# EAGLE board RoomIndicator.Outside.Multiple (EAGLE 6.4)
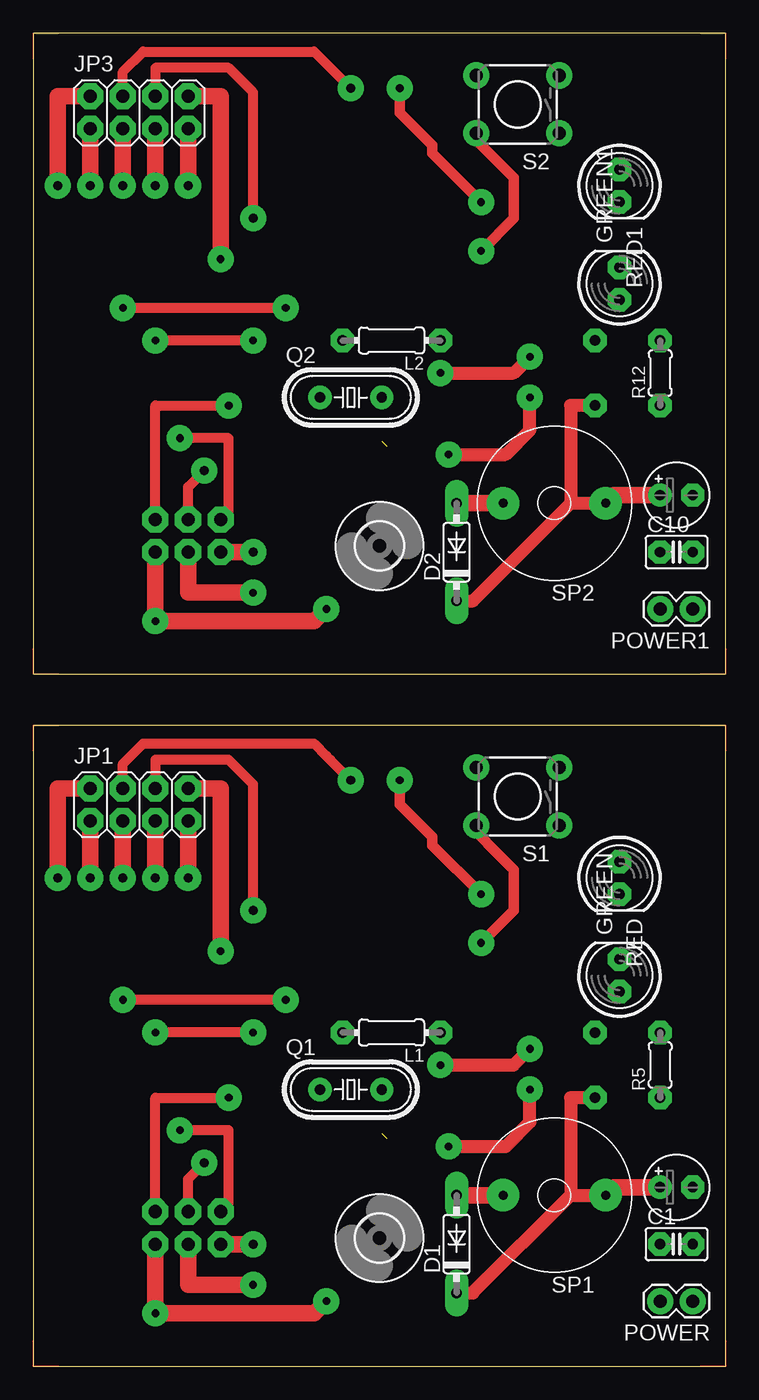
[diagram p0: board, top side]
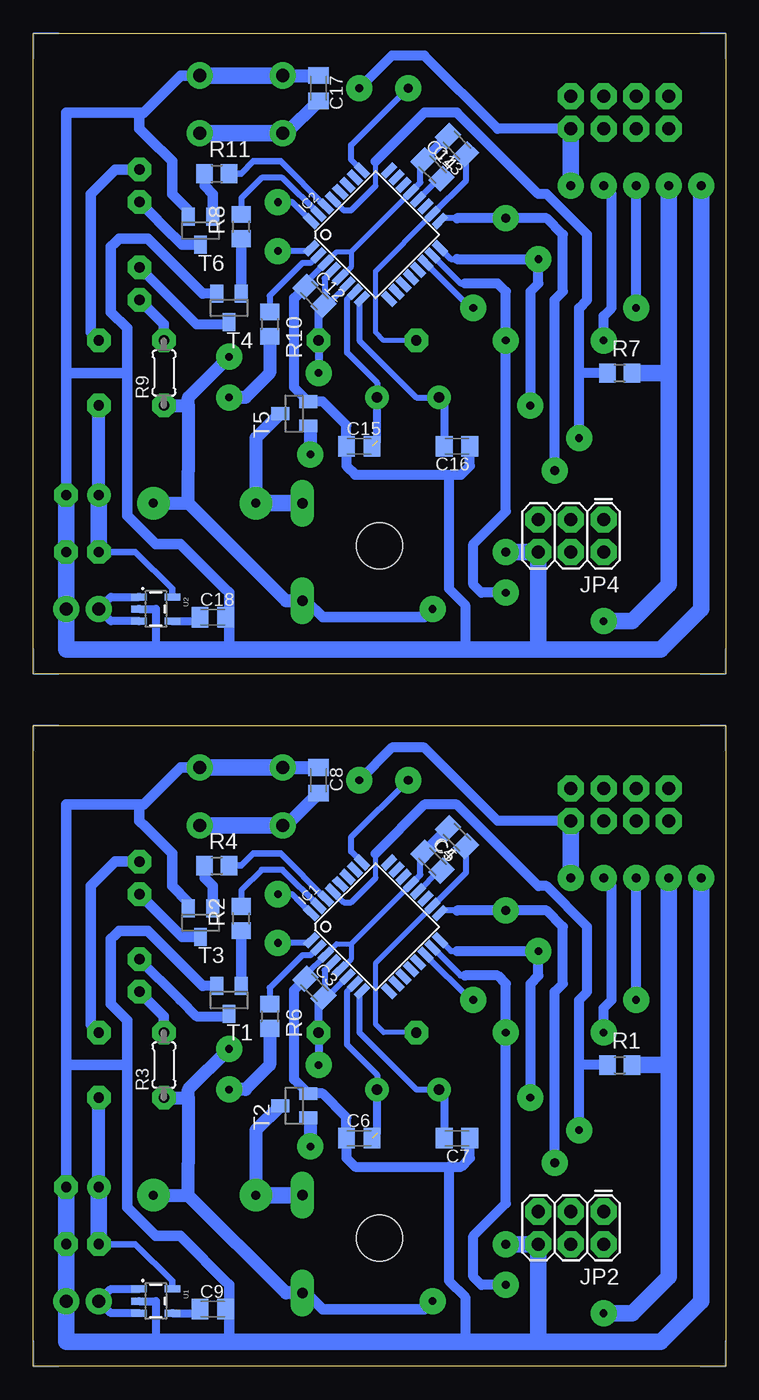
[diagram p1: board, bottom side, seen from below]

Size 54 x 104 mm. Coordinates in mm from the lower left corner, seen from the top.
Outline: 0,0 54,0 54,50 0,50 0,0
Outline: 0,54 54,54 54,104 0,104 0,54
Copper layers (1*16): Top 0.035mm / dielectric 1.5mm / Bottom 0.035mm
Design rules "default *": minimum track width 10mil, minimum drill 24mil, track to track 8mil, track to pad 8mil, pad to pad 8mil, via to via 8mil, smd to smd 8mil, copper to edge 40mil, drill to drill 8mil, minimum pad ring 20mil, minimum via ring 10mil, stop-mask expansion 4mil, vias tented up to drill 0mil, thermal gap 10mil

## Footprints (pad centres in the part's own frame; a part is rotated, then mirrored left to right if it is on the bottom)
C025-025X050 = drill 0.813 octagon: 1 -1.27,0; 2 1.27,0
E2,5-5 = drill 0.813 pad 1.6: + -1.27,0 | drill 0.813 pad 1.6 octagon: - 1.27,0
C0805K = smd 1.3 x 1.6: 1 -1,0; 2 1,0
DO35-7 = drill 0.813 long: A 3.81,0; C -3.81,0
LED5MM = drill 0.813 octagon: A -1.27,0; K 1.27,0
TQFP32-08 = smd 1.27 x 0.559: 1 -4.293,2.8; 2 -4.293,2; 3 -4.293,1.2; 4 -4.293,0.4; 5 -4.293,-0.4; 6 -4.293,-1.2; 7 -4.293,-2; 8 -4.293,-2.8; 17 4.293,-2.8; 18 4.293,-2; 19 4.293,-1.2; 20 4.293,-0.4; 21 4.293,0.4; 22 4.293,1.2; 23 4.293,2; 24 4.293,2.8 | smd 0.559 x 1.27: 9 -2.8,-4.293; 10 -2,-4.293; 11 -1.2,-4.293; 12 -0.4,-4.293; 13 0.4,-4.293; 14 1.2,-4.293; 15 2,-4.293; 16 2.8,-4.293; 25 2.8,4.293; 26 2,4.293; 27 1.2,4.293; 28 0.4,4.293; 29 -0.4,4.293; 30 -1.2,4.293; 31 -2,4.293; 32 -2.8,4.293
2X04 = drill 1.016 octagon: 1 -3.81,-1.27; 2 -3.81,1.27; 3 -1.27,-1.27; 4 -1.27,1.27; 5 1.27,-1.27; 6 1.27,1.27; 7 3.81,-1.27; 8 3.81,1.27
2X3 = drill 1.016 pad 1.88 octagon: 1 0,0; 2 0,2.54; 3 2.54,0; 4 2.54,2.54; 5 5.08,0; 6 5.08,2.54
0204/7 = drill 0.813 octagon: 1 -3.81,0; 2 3.81,0
1X02 = drill 1.016 pad 1.88: 1 0,0; 2 2.54,0
HC49/S = drill 0.813: 1 -2.413,0; 2 2.413,0
R0805 = smd 1.3 x 1.5: 1 -0.95,0; 2 0.95,0
0204/5 = drill 0.813 octagon: 1 -2.54,0; 2 2.54,0
TACTILE-PTH = drill 1.016 pad 1.88: 1 -3.251,2.261; 2 3.251,2.261; 3 -3.251,-2.261; 4 3.251,-2.261
AL80P = drill 0.7 pad 2.54: 1 -4,0; 2 4,0
SOT23 = smd 1 x 1.4: 1 -0.95,-1.1; 2 0.95,-1.1; 3 0,1.1
SOT23-5 = smd 0.55 x 1.2: 1 -0.95,-1.3; 2 0,-1.3; 3 0.95,-1.3; 4 0.95,1.3; 5 -0.95,1.3
3,6 = hole 3.6: 0,0

## Placement (x,y rotation side)
C1  100n  [C025-025X050]  50.16,9.53 0 top
C2  100uF  [E2,5-5]  50.16,13.97 0 top
C3  100n  [C0805K]  32.07,29.53 315 bottom
C4  100n  [C0805K]  22.86,39.37 315 bottom
C5  100n  [C0805K]  20.95,41.27 135 bottom
C6  27p  [C0805K]  28.57,17.78 0 bottom
C7  27p  [C0805K]  20.95,17.78 180 bottom
C8  100n  [C0805K]  31.75,45.72 270 bottom
C9  180p  [C0805K]  40.01,4.45 0 bottom
C10  100n  [C025-025X050]  50.16,63.52 0 top
C11  100uF  [E2,5-5]  50.16,67.97 0 top
C12  100n  [C0805K]  32.07,83.53 315 bottom
C13  100n  [C0805K]  22.86,93.37 315 bottom
C14  100n  [C0805K]  20.95,95.28 135 bottom
C15  27p  [C0805K]  28.57,71.78 0 bottom
C16  27p  [C0805K]  20.95,71.78 180 bottom
C17  100n  [C0805K]  31.75,99.72 270 bottom
C18  180p  [C0805K]  40.01,58.45 0 bottom
D1  1N4148  [DO35-7]  33.02,9.53 90 top
D2  1N4148  [DO35-7]  33.02,63.52 90 top
GREEN  GREEN  [LED5MM]  45.72,30.48 90 top
GREEN1  GREEN  [LED5MM]  45.72,84.48 90 top
IC1  MEGA328P  [TQFP32-08]  27.3,34.29 45 bottom
IC2  MEGA328P  [TQFP32-08]  27.3,88.29 45 bottom
JP1  NRF24L01  [2X04]  8.26,43.81 0 top
JP2  SPI  [2X3]  9.53,12.06 180 bottom
JP3  NRF24L01  [2X04]  8.26,97.81 0 top
JP4  SPI  [2X3]  9.53,66.06 180 bottom
L1  10uH  [0204/7]  27.94,26.04 180 top
L2  10uH  [0204/7]  27.94,80.03 180 top
POWER  [1X02]  51.44,5.08 180 top
POWER1  [1X02]  51.44,59.08 180 top
Q1  8MHz  [HC49/S]  24.77,21.59 0 top
Q2  8MHz  [HC49/S]  24.77,75.59 0 top
R1  10k  [R0805]  8.26,23.5 0 bottom
R2  10k  [R0805]  37.78,34.92 90 bottom
R3  30  [0204/5]  43.81,23.5 90 bottom
R4  10k  [R0805]  39.69,39.05 0 bottom
R5  30  [0204/5]  48.9,23.5 90 top
R6  10k  [R0805]  35.56,27.3 270 bottom
R7  10k  [R0805]  8.26,77.5 0 bottom
R8  10k  [R0805]  37.78,88.92 90 bottom
R9  30  [0204/5]  43.81,77.5 90 bottom
R10  10k  [R0805]  35.56,81.31 270 bottom
R11  10k  [R0805]  39.69,93.05 0 bottom
R12  30  [0204/5]  48.9,77.5 90 top
RED  GREEN  [LED5MM]  45.72,38.1 270 top
RED1  GREEN  [LED5MM]  45.72,92.1 270 top
S1  [TACTILE-PTH]  37.78,44.45 180 top
S2  [TACTILE-PTH]  37.78,98.45 180 top
SP1  AL60PWIDE  [AL80P]  40.64,13.34 180 top
SP2  AL60PWIDE  [AL80P]  40.64,67.33 180 top
T1  BC847  [SOT23]  38.73,28.57 180 bottom
T2  BC847  [SOT23]  33.66,20.32 90 bottom
T3  BC847  [SOT23]  40.96,34.61 180 bottom
T4  BC847  [SOT23]  38.73,82.58 180 bottom
T5  BC847  [SOT23]  33.66,74.32 90 bottom
T6  BC847  [SOT23]  40.96,88.61 180 bottom
U1  3.3V/150mA  [SOT23-5]  44.45,5.08 270 bottom
U2  3.3V/150mA  [SOT23-5]  44.45,59.08 270 bottom
U$1  [3,6]  27,10 0 top
U$2  [3,6]  27,64 0 top

## Library data of the parts
C1-C18 L1 L2 R1-R12 = rcl
D1 D2 = diode
GREEN GREEN1 RED RED1 = led
IC1 IC2 = atmel; MPN: ATMEGA8-16AU; OC_FARNELL: 9171371; OC_NEWARK: 73M8863
JP1 JP3 = pinhead
JP2 JP4 POWER POWER1 = SparkFun-Connectors
Q1 Q2 = crystal; OC_FARNELL: 1667008; OC_NEWARK: unknown
S1 S2 = SparkFun-Retired
SP1 SP2 = buzzer
T1-T6 = transistor
U1 U2 = SparkFun-PowerIC; PROD_ID: VREG-00822
U$1 U$2 = holes

## Nets
+3V1: C10.1 C11.+ C12.2 D2.C IC2.4 IC2.6 JP3.1 JP4.2 L2.1 R7.2 R9.1 R12.1 SP2.1 U2.5
+3V3: C1.1 C2.+ C3.2 D1.C IC1.4 IC1.6 JP1.1 JP2.2 L1.1 R1.2 R3.1 R5.1 SP1.1 U1.5
AVCC: C5.1 IC1.18 L1.2
AVCC1: C14.1 IC2.18 L2.2
BLUE: IC1.31 R2.2
BLUE1: IC2.31 R8.2
BUZZ: IC1.2 R6.1
BUZZ1: IC2.2 R10.1
CE: IC1.25 JP1.4
CE1: IC2.25 JP3.4
CSN: IC1.14 JP1.3
CSN1: IC2.14 JP3.3
GND: C1.2 C2.- C3.1 C4.1 C5.2 C6.1 C7.1 C8.1 C9.2 IC1.3 IC1.5 IC1.21 JP1.2 JP2.6 POWER.1 S1.3 S1.4 T1.2 T2.2 T3.2 U1.2
GND1: C10.2 C11.- C12.1 C13.1 C14.2 C15.1 C16.1 C17.1 C18.2 IC2.3 IC2.5 IC2.21 JP3.2 JP4.6 POWER1.1 S2.3 S2.4 T4.2 T5.2 T6.2 U2.2
INT0: IC1.32 JP1.7
INT1: C8.2 IC1.1 S1.1 S1.2
INT2: C17.2 IC2.1 S2.1 S2.2
INT3: IC2.32 JP3.7
MISO: IC1.16 JP1.8 JP2.1
MISO1: IC2.16 JP3.8 JP4.1
MOSI: IC1.15 JP1.5 JP2.4
MOSI1: IC2.15 JP3.5 JP4.4
N$1: POWER.2 U1.1 U1.3
N$2: R4.1 T3.1
N$3: RED.K T3.3
N$4: C4.2 IC1.20
N$5: R6.2 T2.1
N$6: GREEN.A R3.2
N$7: R5.2 RED.A
N$8: C9.1 U1.4
N$10: R2.1 T1.1
N$11: GREEN.K T1.3
N$16: D1.A SP1.2 T2.3
N$20: C13.2 IC2.20
N$21: R8.1 T4.1
N$22: GREEN1.K T4.3
N$23: D2.A SP2.2 T5.3
N$24: R10.2 T5.1
N$25: GREEN1.A R9.2
N$26: POWER1.2 U2.1 U2.3
N$27: R11.1 T6.1
N$28: RED1.K T6.3
N$29: R12.2 RED1.A
N$30: C18.1 U2.4
RED: IC1.30 R4.2
RED1: IC2.30 R11.2
RST: IC1.29 JP2.5 R1.1
RST1: IC2.29 JP4.5 R7.1
SCK: IC1.17 JP1.6 JP2.3
SCK1: IC2.17 JP3.6 JP4.3
TOSC1: C6.2 IC1.7 Q1.2
TOSC2: C7.2 IC1.8 Q1.1
TOSC3: C16.2 IC2.8 Q2.1
TOSC4: C15.2 IC2.7 Q2.2

## Tracks (layer width: path | path; a pad name or v marks a point on that pad's centre or on a via)
+3V1  (via drill 0.6 pad 2.03, 0.7 pad 2.03)
  Top 1.016: v31.75,77.5 37.47,77.5 v38.73,78.77 | D2.C 34.29,59.72 41.91,67.33 | 41.91,67.33 43.81,67.33 | R9.1 41.91,74.95 41.91,67.33
  Top 1.27: JP3.1 v4.45,92.1 | JP4.2 v9.53,58.13 21.91,58.13 v22.86,59.08 | C11.+ 45.27,67.97 SP2.1
  Bottom 0.457: IC2.6 30.76,83.14 C12.2 31.27,82.91 31.27,84.89 IC2.4
  Bottom 0.508: C10.1 46.04,63.52 43.18,60.67 43.18,60.06 U2.5
  Bottom 0.61: C12.2 31.75,82.43 L2.1 v31.75,77.5
  Bottom 0.813: D2.C 32.7,59.72 31.43,58.45 23.5,58.45 v22.86,59.08
  Bottom 1.016: 41.91,74.95 41.91,75.59 v38.73,78.77 | C11.+ R12.1 | R9.1 41.91,74.95 | 41.91,74.95 41.91,69.88 41.91,67.33 | SP2.1 41.91,67.33 | D2.C 34.29,59.72 41.91,67.33
  Bottom 1.27: C10.1 C11.+ | v4.45,92.1 4.45,77.5 | R7.2 4.45,77.5 | 4.45,77.5 4.45,62.89 4.45,62.57 4.45,60.98 7.3,58.13 v9.53,58.13
+3V3  (via drill 0.6 pad 2.03, 0.7 pad 2.03)
  Top 1.016: v31.75,23.5 37.47,23.5 v38.73,24.77 | D1.C 34.29,5.71 41.91,13.34 | 41.91,13.34 43.81,13.34 | R3.1 41.91,20.95 41.91,13.34
  Top 1.27: JP1.1 v4.45,38.1 | JP2.2 v9.53,4.13 21.91,4.13 v22.86,5.08 | C2.+ 45.27,13.97 SP1.1
  Bottom 0.457: IC1.6 30.76,29.14 C3.2 31.27,28.91 31.27,30.89 IC1.4
  Bottom 0.508: C1.1 46.04,9.53 43.18,6.67 43.18,6.06 U1.5
  Bottom 0.61: C3.2 31.75,28.43 L1.1 v31.75,23.5
  Bottom 0.813: D1.C 32.7,5.71 31.43,4.45 23.5,4.45 v22.86,5.08
  Bottom 1.016: 41.91,20.95 41.91,21.59 v38.73,24.77 | C2.+ R5.1 | R3.1 41.91,20.95 | 41.91,20.95 41.91,15.88 41.91,13.34 | SP1.1 41.91,13.34 | D1.C 34.29,5.71 41.91,13.34
  Bottom 1.27: C1.1 C2.+ | v4.45,38.1 4.45,23.5 | R1.2 4.45,23.5 | 4.45,23.5 4.45,8.89 4.45,8.57 4.45,6.99 7.3,4.13 v9.53,4.13
AVCC
  Bottom 0.406: L1.2 26.67,26.04 27.3,26.67 27.3,31.46 IC1.18
  Bottom 0.457: IC1.18 20.25,38.52 C5.1
AVCC1
  Bottom 0.406: L2.2 26.67,80.03 27.3,80.67 27.3,85.46 IC2.18
  Bottom 0.457: IC2.18 20.25,92.52 C14.1
BLUE
  Bottom 0.457: IC1.31 34.58,38.73 36.2,38.73 37.78,37.15 R2.2
BLUE1
  Bottom 0.457: IC2.31 34.58,92.73 36.2,92.73 37.78,91.15 R8.2
BUZZ
  Bottom 0.457: IC1.2 31.78,32.67 32.38,32.07 33.02,32.07 35.56,29.53 R6.1
BUZZ1
  Bottom 0.457: IC2.2 31.78,86.67 32.38,86.07 33.02,86.07 35.56,83.53 R10.1
CE  (via drill 0.7 pad 2.03)
  Top 0.762: JP1.4 6.99,46.99 8.57,48.58 21.91,48.58 22.86,47.62 23.18,47.31 v24.77,45.72
  Bottom 0.457: IC1.25 29.21,40.16 29.21,41.27 v24.77,45.72
CE1  (via drill 0.7 pad 2.03)
  Top 0.762: JP3.4 6.99,100.99 8.57,102.58 21.91,102.58 22.86,101.62 23.18,101.31 v24.77,99.72
  Bottom 0.457: IC2.25 29.21,94.16 29.21,95.28 v24.77,99.72
CSN  (via drill 0.6 pad 2.03, 0.7 pad 2.03)
  Top 0.762: v19.68,28.57 v6.99,28.57
  Top 1.27: JP1.3 v6.99,38.1
  Bottom 0.457: IC1.14 19.89,28.57 v19.68,28.57
  Bottom 0.762: v6.99,28.57 v6.99,38.1
CSN1  (via drill 0.6 pad 2.03, 0.7 pad 2.03)
  Top 0.762: v19.68,82.58 v6.99,82.58
  Top 1.27: JP3.3 v6.99,92.1
  Bottom 0.457: IC2.14 19.89,82.58 v19.68,82.58
  Bottom 0.762: v6.99,82.58 v6.99,92.1
GND  (via drill 0.7 pad 2.03)
  Top 1.27: JP1.2 1.91,45.09 v1.91,38.1 | JP2.6 v17.14,9.53
  Bottom 0.406: 29.21,32.95 29.21,31.75 29.99,30.97 IC1.5 | IC1.21 29.21,32.95 | IC1.3 30.34,32.95 29.21,32.95
  Bottom 0.457: 32.74,30.55 C3.1 32.77,30.52 IC1.3 | IC1.21 23.81,38.35 23.81,39.83 C4.1
  Bottom 0.61: 33.09,30.41 C3.1 | U1.2 44.45,5.08 44.45,1.91
  Bottom 0.762: C3.1 33.66,29.35 33.66,22.37 T2.2 31.43,21.27 29.57,19.41 C6.1 29.57,16.24 28.89,15.56 21.59,15.56 | C5.2 C4.1 | 21.59,15.56 20.64,15.56 19.95,16.24 C7.1 | 21.59,15.56 21.59,6.67 20.32,5.4 20.32,1.91 | T1.2 40.79,29.68
  Bottom 0.813: C2.- 51.44,18.73 51.44,23.5 | 51.44,23.5 51.44,31.75 51.44,43.81 45.72,43.81 | 51.44,23.5 47.62,23.5 46.67,23.5 | 45.72,43.81 45.4,43.81 45.24,43.97 42.51,46.71 S1.3 | 40.79,29.68 45.09,33.97 47.31,33.97 47.62,33.66 47.94,33.34 47.94,28.26 46.67,26.99 46.67,23.5 | 46.67,23.5 46.67,22.54 46.67,16.19 46.67,12.7 46.67,12.38 44.45,10.16 44.13,10.16 | T3.2 41.91,36.19 43.18,37.47 43.18,40.01 45.09,41.91 45.24,42.07 45.72,42.55 45.72,43.81 | 44.13,10.16 43.81,10.16 | 38.73,5.08 38.73,6.35 39.05,6.67 42.23,9.84 42.55,10.16 44.13,10.16 | 38.73,5.08 38.73,4.71 C9.2 | 38.73,1.91 38.73,5.08
  Bottom 1.016: 34.6,46.71 C8.1
  Bottom 1.27: 35.88,1.91 36.2,1.91 | 36.2,1.91 35.88,1.91 | 35.88,1.91 35.56,1.91 27.94,1.91 20.32,1.91 14.61,1.91 | 14.61,1.91 5.08,1.91 1.91,5.08 v1.91,38.1 | C2.- C1.2 POWER.1 51.44,1.91 48.9,1.91 44.45,1.91 39.37,1.91 | 14.61,1.91 JP2.6 v17.14,9.53 | 34.6,46.71 S1.4 34.6,46.71 | 34.6,46.71 S1.3 | 36.2,1.91 38.73,1.91 39.37,1.91 | 39.37,1.91 40.32,1.91
GND1  (via drill 0.7 pad 2.03)
  Top 1.27: JP3.2 1.91,99.08 v1.91,92.1 | JP4.6 v17.14,63.52
  Bottom 0.406: 29.21,86.95 29.21,85.75 29.99,84.97 IC2.5 | IC2.21 29.21,86.95 | IC2.3 30.34,86.95 29.21,86.95
  Bottom 0.457: 32.74,84.55 C12.1 32.77,84.52 IC2.3 | IC2.21 23.81,92.35 23.81,93.83 C13.1
  Bottom 0.61: 33.09,84.41 C12.1 | U2.2 44.45,59.08 44.45,55.91
  Bottom 0.762: C12.1 33.66,83.35 33.66,76.37 T5.2 31.43,75.27 29.57,73.42 C15.1 29.57,70.24 28.89,69.56 21.59,69.56 | C14.2 C13.1 | 21.59,69.56 20.64,69.56 19.95,70.24 C16.1 | 21.59,69.56 21.59,60.67 20.32,59.4 20.32,55.91 | T4.2 40.79,83.67
  Bottom 0.813: C11.- 51.44,72.73 51.44,77.5 | 51.44,77.5 51.44,85.75 51.44,97.81 45.72,97.81 | 51.44,77.5 47.62,77.5 46.67,77.5 | 45.72,97.81 45.4,97.81 45.24,97.97 42.51,100.71 S2.3 | 40.79,83.67 45.09,87.97 47.31,87.97 47.62,87.66 47.94,87.34 47.94,82.26 46.67,80.99 46.67,77.5 | 46.67,77.5 46.67,76.54 46.67,70.19 46.67,66.7 46.67,66.38 44.45,64.16 44.13,64.16 | T6.2 41.91,90.19 43.18,91.47 43.18,94 45.09,95.91 45.24,96.07 45.72,96.55 45.72,97.81 | 44.13,64.16 43.81,64.16 | 38.73,59.08 38.73,60.35 39.05,60.67 42.23,63.84 42.55,64.16 44.13,64.16 | 38.73,59.08 38.73,58.72 C18.2 | 38.73,55.91 38.73,59.08
  Bottom 1.016: 34.6,100.71 C17.1
  Bottom 1.27: 35.88,55.91 36.2,55.91 | 36.2,55.91 35.88,55.91 | 35.88,55.91 35.56,55.91 27.94,55.91 20.32,55.91 14.61,55.91 | 14.61,55.91 5.08,55.91 1.91,59.08 v1.91,92.1 | C11.- C10.2 POWER1.1 51.44,55.91 48.9,55.91 44.45,55.91 39.37,55.91 | 14.61,55.91 JP4.6 v17.14,63.52 | 34.6,100.71 S2.4 34.6,100.71 | 34.6,100.71 S2.3 | 36.2,55.91 38.73,55.91 39.37,55.91 | 39.37,55.91 40.32,55.91
INT0  (via drill 0.6 pad 2.03, 0.7 pad 2.03)
  Top 0.813: v28.57,45.72 28.57,43.81 31.11,41.27 31.11,40.64 v34.92,36.83
  Top 1.27: v12.06,38.1 JP1.7
  Bottom 0.457: IC1.32 33.17,36.2 33.8,36.83 v34.92,36.83
  Bottom 0.762: JP1.7 17.78,42.55 23.5,48.26 26.04,48.26 v28.57,45.72
  Bottom 1.27: v12.06,38.1 JP1.7
INT1  (via drill 0.6 pad 2.03)
  Top 0.813: v34.92,33.02 37.47,35.56 37.47,38.73 36.2,40.01 34.53,41.67 S1.2
  Bottom 0.457: IC1.1 32.53,33.02 v34.92,33.02
  Bottom 1.016: 35.23,42.19 34.28,42.19 C8.2
  Bottom 1.27: 35.23,42.19 S1.2 35.23,42.19 | 35.23,42.19 S1.1
INT2  (via drill 0.6 pad 2.03)
  Top 0.813: v34.92,87.02 37.47,89.56 37.47,92.73 36.2,94 34.53,95.67 S2.2
  Bottom 0.457: IC2.1 32.53,87.02 v34.92,87.02
  Bottom 1.016: 35.23,96.19 34.28,96.19 C17.2
  Bottom 1.27: 35.23,96.19 S2.2 35.23,96.19 | 35.23,96.19 S2.1
INT3  (via drill 0.6 pad 2.03, 0.7 pad 2.03)
  Top 0.813: v28.57,99.72 28.57,97.81 31.11,95.28 31.11,94.64 v34.92,90.83
  Top 1.27: v12.06,92.1 JP3.7
  Bottom 0.457: IC2.32 33.17,90.19 33.8,90.83 v34.92,90.83
  Bottom 0.762: JP3.7 17.78,96.55 23.5,102.26 26.04,102.26 v28.57,99.72
  Bottom 1.27: v12.06,92.1 JP3.7
MISO  (via drill 0.6 pad 2.03)
  Top 0.762: JP2.1 9.53,20.95 v15.24,20.95
  Top 1.27: JP1.8 14.61,45.09 v14.61,32.38
  Bottom 0.457: IC1.16 21.44,32.38 20.95,32.38
  Bottom 0.762: 20.95,32.38 v14.61,32.38 14.61,30.48 15.24,29.84 v15.24,20.95
MISO1  (via drill 0.6 pad 2.03)
  Top 0.762: JP4.1 9.53,74.95 v15.24,74.95
  Top 1.27: JP3.8 14.61,99.08 v14.61,86.39
  Bottom 0.457: IC2.16 21.44,86.39 20.95,86.39
  Bottom 0.762: 20.95,86.39 v14.61,86.39 14.61,84.48 15.24,83.84 v15.24,74.95
MOSI  (via drill 0.6 pad 2.03, 0.7 pad 2.03)
  Top 0.762: v17.14,26.04 v9.53,26.04
  Top 1.27: JP1.5 v9.53,38.1 | JP2.4 12.06,6.35 v17.14,6.35
  Bottom 0.457: IC1.15 20.67,30.48 20.32,30.48
  Bottom 0.762: 20.32,30.48 17.78,30.48 17.14,29.84 v17.14,26.04 17.14,12.7 19.68,10.16 19.68,6.99 19.05,6.35 v17.14,6.35 | v9.53,26.04 9.53,27.94 8.89,28.57 8.89,37.47 v9.53,38.1
MOSI1  (via drill 0.6 pad 2.03, 0.7 pad 2.03)
  Top 0.762: v17.14,80.03 v9.53,80.03
  Top 1.27: JP3.5 v9.53,92.1 | JP4.4 12.06,60.35 v17.14,60.35
  Bottom 0.457: IC2.15 20.67,84.48 20.32,84.48
  Bottom 0.762: 20.32,84.48 17.78,84.48 17.14,83.84 v17.14,80.03 17.14,66.7 19.68,64.16 19.68,60.98 19.05,60.35 v17.14,60.35 | v9.53,80.03 9.53,81.94 8.89,82.58 8.89,91.47 v9.53,92.1
N$1
  Bottom 0.61: U1.1 47.95,6.03 POWER.2 47.95,4.13 U1.3
N$2
  Bottom 0.813: T3.1 40.01,37.47 40.64,38.1 R4.1
N$3
  Bottom 0.813: T3.3 42.4,33.51 43.81,34.92 44.77,35.88 RED.K
N$4
  Bottom 0.457: IC1.20 22.37,38.66 C4.2
N$5  (via drill 0.6 pad 2.03)
  Top 1.016: v32.38,17.14 36.83,17.14 38.73,19.05 v38.73,21.59
  Bottom 1.016: T2.1 32.38,19.37 v32.38,17.14 | R6.2 35.56,23.5 37.47,21.59 v38.73,21.59
N$6
  Bottom 0.813: R3.2 43.81,27.3 GREEN.A
N$7
  Bottom 0.813: R5.2 49.53,26.67 49.53,37.47 47.62,39.37 RED.A
N$8
  Bottom 0.61: U1.4 41.32,4.13 C9.1
N$9
  Bottom 0.1: 0,48 0,50 2,50
N$10
  Bottom 0.813: T1.1 R2.1
N$11
  Bottom 0.762: T1.3 38.91,27.3 41.27,27.3 42.55,28.57 GREEN.K
N$12
  Bottom 0.1: 52,50 54,50 54,48
N$13
  Bottom 0.1: 52,0 54,0 54,2
N$14
  Bottom 0.1: 0,2 0,0 2,0
N$15
  Top 0.1: 0,48 0,50 2,50
N$16
  Top 1.27: D1.A SP1.2
  Bottom 1.016: T2.3 36.64,18.43 SP1.2
  Bottom 1.27: 36.83,13.34 D1.A
N$17
  Top 0.1: 52,50 54,50 54,48
N$18
  Top 0.1: 52,0 54,0 54,2
N$19
  Top 0.1: 0,2 0,0 2,0
N$20
  Bottom 0.457: IC2.20 22.37,92.66 C13.2
N$21
  Bottom 0.813: T4.1 R8.1
N$22
  Bottom 0.762: T4.3 38.91,81.31 41.27,81.31 42.55,82.58 GREEN1.K
N$23
  Top 1.27: D2.A SP2.2
  Bottom 1.016: T5.3 36.64,72.44 SP2.2
  Bottom 1.27: 36.83,67.33 D2.A
N$24  (via drill 0.6 pad 2.03)
  Top 1.016: v32.38,71.14 36.83,71.14 38.73,73.05 v38.73,75.59
  Bottom 1.016: T5.1 32.38,73.37 v32.38,71.14 | R10.2 35.56,77.5 37.47,75.59 v38.73,75.59
N$25
  Bottom 0.813: R9.2 43.81,81.31 GREEN1.A
N$26
  Bottom 0.61: U2.1 47.95,60.03 POWER1.2 47.95,58.13 U2.3
N$27
  Bottom 0.813: T6.1 40.01,91.47 40.64,92.1 R11.1
N$28
  Bottom 0.813: T6.3 42.4,87.51 43.81,88.92 44.77,89.88 RED1.K
N$29
  Bottom 0.813: R12.2 49.53,80.67 49.53,91.47 47.62,93.37 RED1.A
N$30
  Bottom 0.61: U2.4 41.32,58.13 C18.1
N$31
  Bottom 0.1: 0,102 0,104 2,104
N$32
  Bottom 0.1: 52,104 54,104 54,102
N$33
  Bottom 0.1: 52,54 54,54 54,56
N$34
  Bottom 0.1: 0,56 0,54 2,54
N$35
  Top 0.1: 0,102 0,104 2,104
N$36
  Top 0.1: 52,104 54,104 54,102
N$37
  Top 0.1: 52,54 54,54 54,56
N$38
  Top 0.1: 0,56 0,54 2,54
RED
  Bottom 0.508: IC1.30 34.72,40.01 36.83,40.01 37.78,39.05 R4.2
RED1
  Bottom 0.508: IC2.30 34.72,94 36.83,94 37.78,93.05 R11.2
RST  (via drill 0.6 pad 2.03)
  Top 0.762: JP2.5 15.24,12.7 15.24,18.41 v11.43,18.41
  Bottom 0.406: 27.3,38.1 27.3,40.01
  Bottom 0.457: IC1.29 29.78,36.2 29.21,36.2 27.3,38.1
  Bottom 0.762: 27.3,40.01 23.5,43.81 20.95,43.81 14.61,37.47 13.97,37.47 10.79,34.29 10.79,29.21 11.43,28.57 11.43,23.5 | R1.1 11.43,23.5 | v11.43,18.41 11.43,23.5
RST1  (via drill 0.6 pad 2.03)
  Top 0.762: JP4.5 15.24,66.7 15.24,72.42 v11.43,72.42
  Bottom 0.406: 27.3,92.1 27.3,94
  Bottom 0.457: IC2.29 29.78,90.19 29.21,90.19 27.3,92.1
  Bottom 0.762: 27.3,94 23.5,97.81 20.95,97.81 14.61,91.47 13.97,91.47 10.79,88.29 10.79,83.21 11.43,82.58 11.43,77.5 | R7.1 11.43,77.5 | v11.43,72.42 11.43,77.5
SCK  (via drill 0.7 pad 2.03)
  Top 0.762: v17.14,35.56 17.14,45.4 15.24,47.31 9.53,47.31 JP1.6 | JP2.3 12.06,14.61 v13.34,15.88
  Bottom 0.457: 20.95,35.56 22.07,35.56 IC1.17
  Bottom 0.762: 20.95,35.56 v17.14,35.56 13.97,35.56 12.7,34.29 12.7,29.84 13.34,29.21 v13.34,15.88
SCK1  (via drill 0.7 pad 2.03)
  Top 0.762: v17.14,89.56 17.14,99.4 15.24,101.31 9.53,101.31 JP3.6 | JP4.3 12.06,68.61 v13.34,69.88
  Bottom 0.457: 20.95,89.56 22.07,89.56 IC2.17
  Bottom 0.762: 20.95,89.56 v17.14,89.56 13.97,89.56 12.7,88.29 12.7,83.84 13.34,83.21 v13.34,69.88
TOSC1  (1 unrouted)
  Bottom 0.457: Q1.2 27.18,22.73 29.53,25.08 29.53,29.24 IC1.7
  Bottom 0.61: 27.18,18.18 Q1.2
TOSC2
  Bottom 0.457: IC1.8 28.57,29.06 28.57,26.04 24.13,21.59 Q1.1
  Bottom 0.61: Q1.1 21.95,21.19 C7.2
TOSC3
  Bottom 0.457: IC2.8 28.57,83.06 28.57,80.03 24.13,75.59 Q2.1
  Bottom 0.61: Q2.1 21.95,75.19 C16.2
TOSC4  (1 unrouted)
  Bottom 0.457: Q2.2 27.18,76.73 29.53,79.08 29.53,83.24 IC2.7
  Bottom 0.61: 27.18,72.18 Q2.2